# Altium PCB pdb-25.PcbDoc (part 2 of 4)
Units mil, origin at the board's own origin, x right, y up, seen from the top; angles counter-clockwise.
Board outline 5000 x 5500 mil, 4 copper layers (Top Layer, GND, 3V3, Bottom Layer), stack 23.756 mil thick; 410 components, 167 nets, 1014 pads, 884 vias.
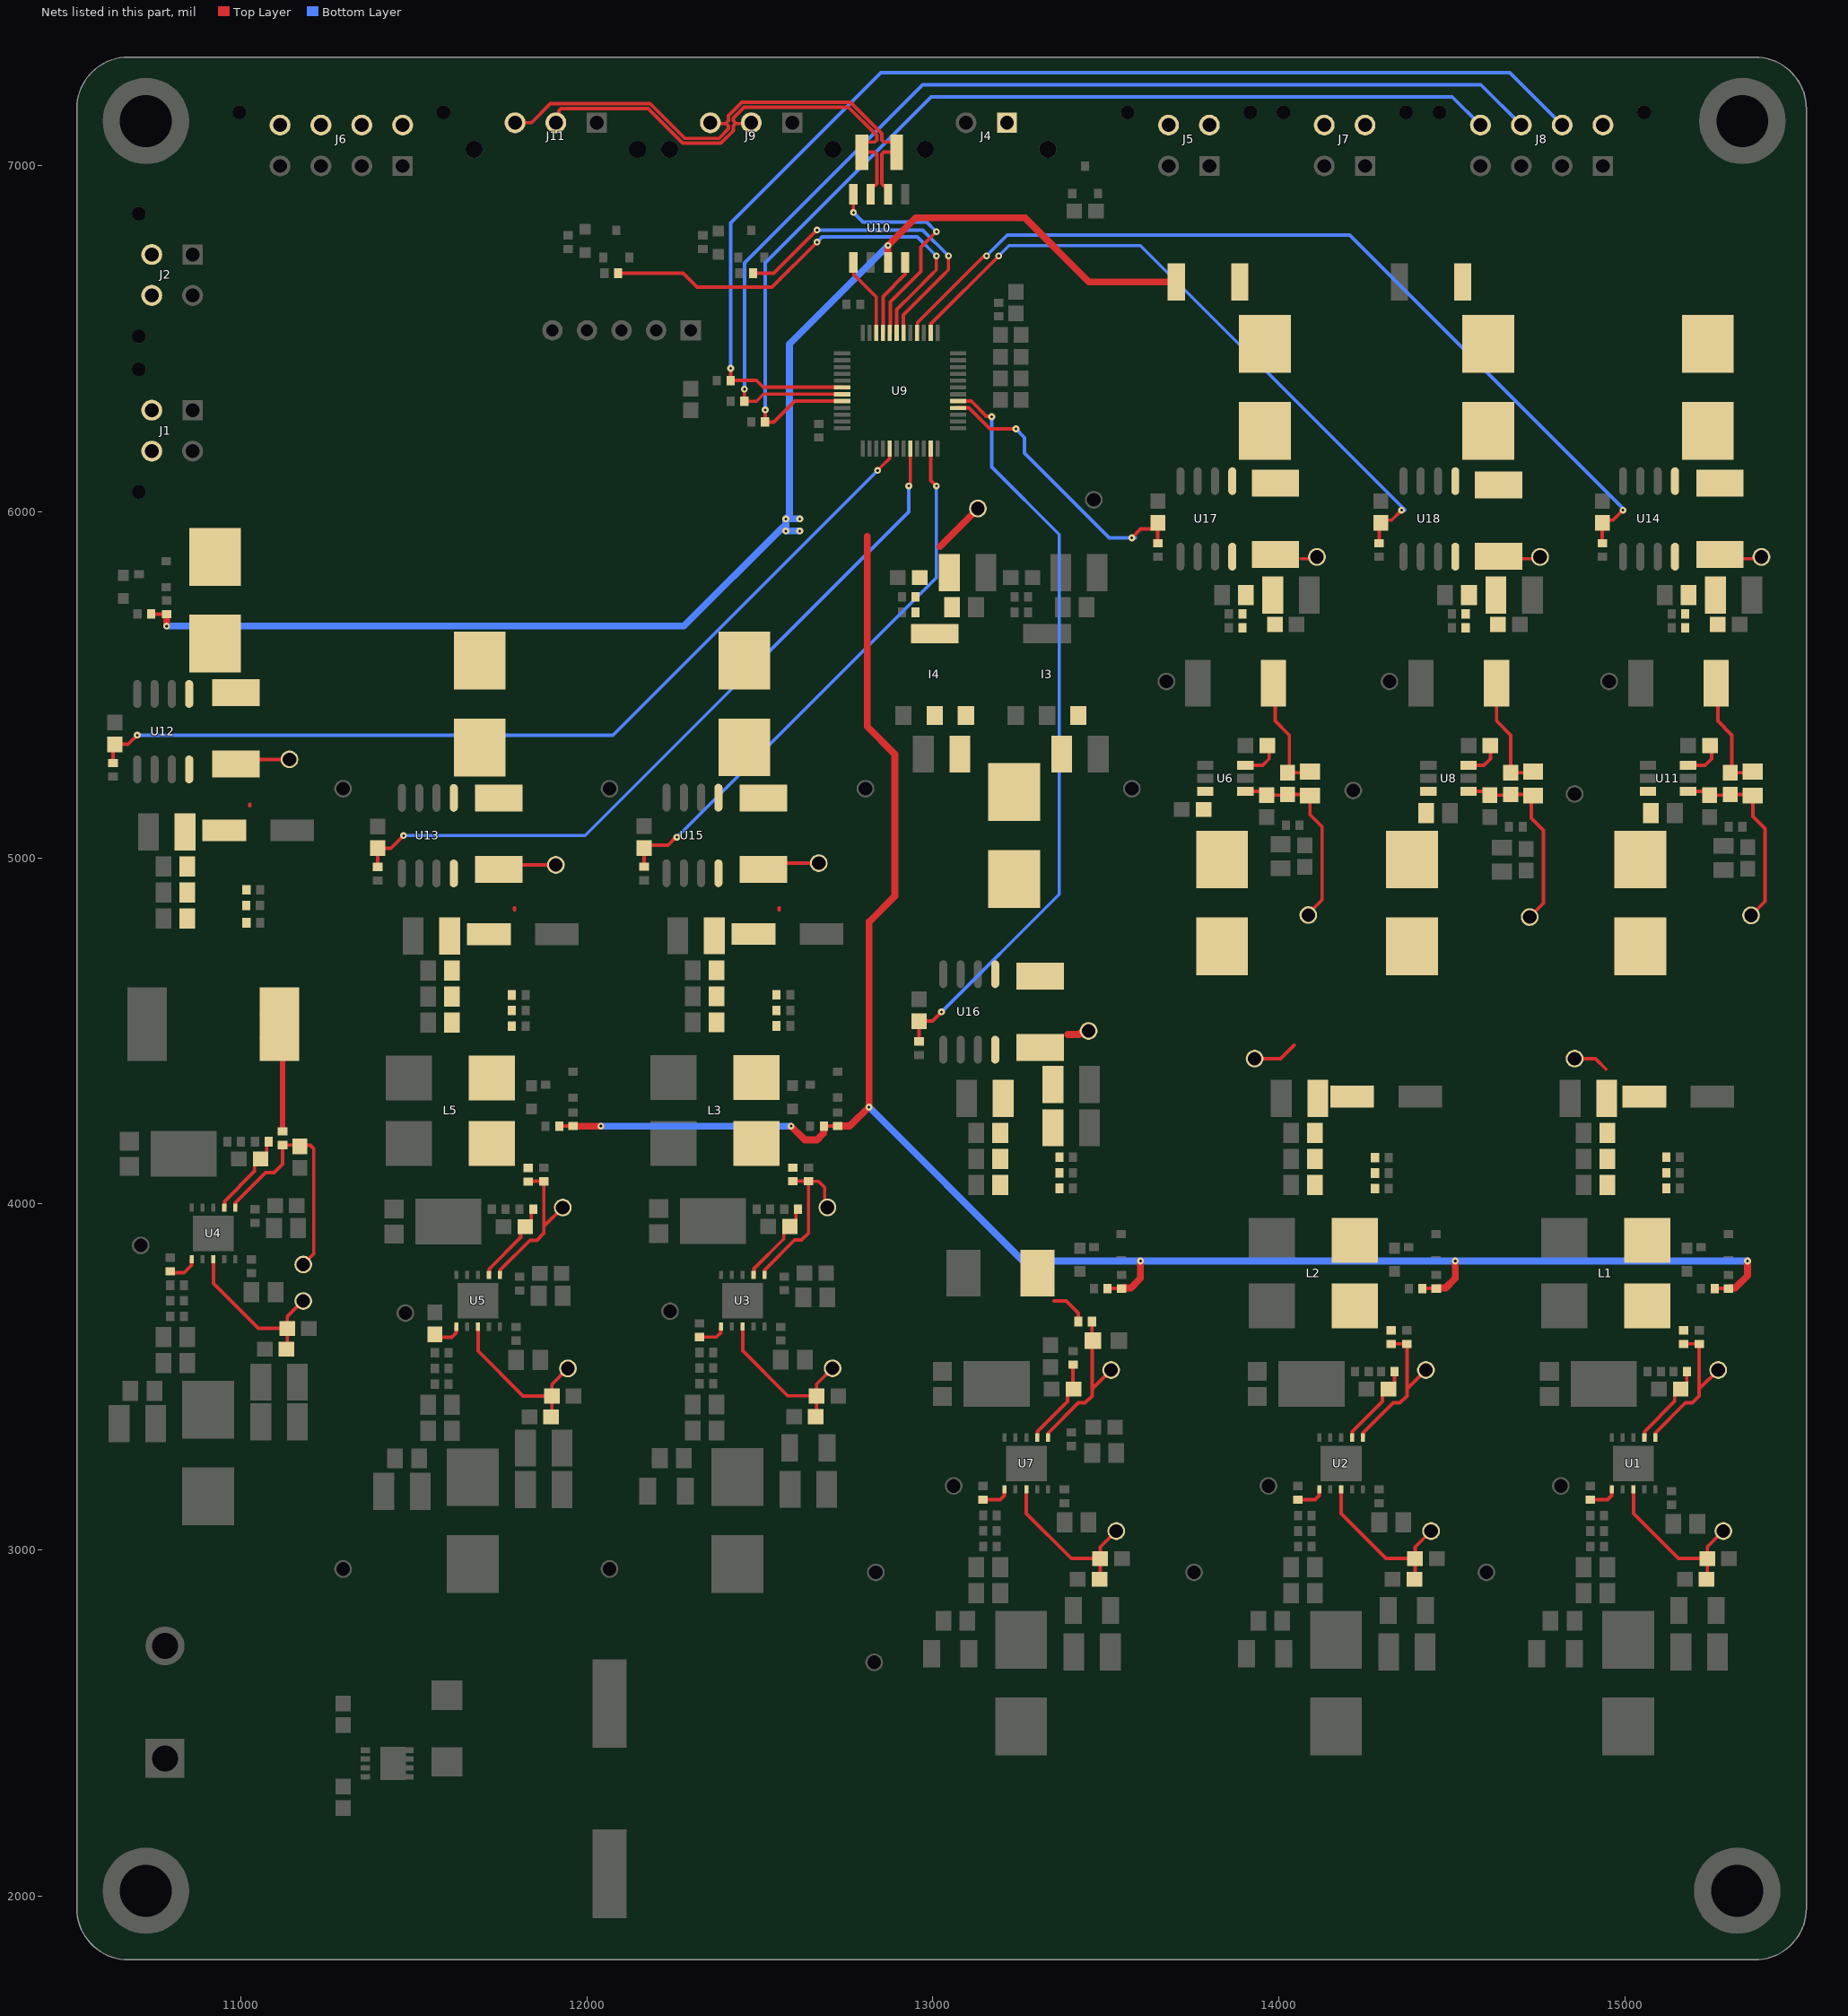
[diagram p4: the nets of this part, all layers, seen from the top]

## Part data
3V3 3V3 3V3 5V 5V 7V 12V 12V 12V 18V 24V EN EN EN EN EN EN FB FB FB FB FB FB FB FB FB GND GND GND GND GND GND GND GND GND GND GND SW SW SW SW SW SW SW SW SW VBAT: library part TEST-POINT-0001, "Oranange PC Test Point, Miniature Phoisphor Bronze Silver Plating Through Hole Mounting Type"
C1 C4 C22 C25 C43 C46 C64 C67 C79 C80 C85 C88 C100 C101 C114 C117: library part CAP-10U-0002, "CAP CER 10UF 50V X7R 1210", Capacitance="10 uF", Voltage=50V, ComponentLink1Description=Datasheet, ComponentLink1URL=https://mm.digikey.com/Volume0/opasdata/d220001/medias/docus/41/CL32B106KBJNNNE_Spec.pdf, Device Class=Ceramic, Size=1210
C2 C5 C23 C26 C44 C47 C65 C68 C86 C89 C115 C118: library part CAP-1U-0001, "CAP CER 1UF 50V X7R 0805", Capacitance="1.0 uF", Voltage="50 V", ComponentLink2Description=Datasheet, ComponentLink2URL=https://www.yageo.com/upload/media/product/productsearch/datasheet/mlcc/UPY-GPHC_X7R_6.3V-to-250V_24.pdf, Device Class=Ceramic, Size=0805
C3 C6 C24 C27 C45 C48 C66 C69 C87 C90 C116 C147 C148 C149 C150 C151 C152 C153 C161: library part CAP-0.1U-0002, "CAP CER 0.1UF 50V X7R 0805", Capacitance="100 nF", Voltage Rating="50 V", ComponentLink2Description=Datasheet, ComponentLink2URL=https://www.yageo.com/upload/media/product/productsearch/datasheet/mlcc/UPY-GPHC_X7R_6.3V-to-250V_24.pdf, Device Class=Ceramic, Size=0805
C7 C11 C28 C32 C49 C53 C70 C74 C91 C95 C162 C166: library part CAP-10N-0001, "CAP CER 10000PF 50V C0G/NP0 0805", Capacitance=10nF, Voltage=50V, ComponentLink1Description=Datasheet, ComponentLink1URL=https://search.murata.co.jp/Ceramy/image/img/A01X/G101/ENG/GRM2195C1H103JA01-01.pdf, Device Class=Ceramic, Size=0805
C8 C12 C29 C33 C50 C54 C71 C75 C92 C96 C163 C167: library part CAP-1N-0001, "CAP CER 1000PF 50V X7R 0402", Capacitance="1.0 nF", Voltage="50 V", ComponentLink2Description=Datasheet, ComponentLink2URL=http://www.yageo.com/documents/recent/UPY-GP_NP0_16V-to-50V_16.pdf, Device Class=Ceramic, Size=0402
C9 C13 C30 C34 C51 C55 C72 C76 C93 C97 C164 C177: library part CAP-100P-0001, "CAP CER 100PF 50V C0G/NPO 0402", Capacitance="100 pF", Voltage=50V, ComponentLink1Description=Datasheet, ComponentLink1URL=https://www.yageo.com/upload/media/product/productsearch/datasheet/mlcc/UPY-GP_NP0_16V-to-50V_18.pdf, Device Class=Ceramic, Size=0402
C10 C14 C31 C35 C52 C56 C73 C77 C94 C98 C165 C179: library part CAP-10P-0001, "CAP CER 10PF 50V C0G/NPO 0402", Capacitance="10 pF", Voltage=50V, ComponentLink1Description=Datasheet, ComponentLink1URL=https://www.yageo.com/upload/media/product/productsearch/datasheet/mlcc/UPY-GP_NP0_16V-to-50V_18.pdf, Device Class=Ceramic, Size=0402
C15 C36 C57 C78 C108 C109 C121 C122 C128 C129 C136 C137 C139 C140 C141 C171 C172 C180: library part CAP-0.1U-0001, "CAP CER 0.1UF 16V X7R 0402", Capacitance="100 nF", Voltage Rating="16 V", ComponentLink2Description=Datasheet, ComponentLink2URL=https://www.yageo.com/upload/media/product/productsearch/datasheet/mlcc/UPY-GPHC_X7R_6.3V-to-250V_24.pdf, Device Class=Ceramic, Size=0402
C16 C17 C37 C38 C58 C59 C181 C182: library part CAP-2.2U-0001, "CAP CER 2.2UF 100V X7R 1206", Capacitance=2.2uF, Voltage=100V, ComponentLink1Description=Datasheet, ComponentLink1URL=https://www.yageo.com/upload/media/product/productsearch/datasheet/mlcc/UPY-GPHC_X7R_6.3V-to-250V_24.pdf, Device Class=Ceramic, Size=1206
C18 C39 C60 C81 C102: library part CAP-47U-0003, "47 µF 35 V Aluminum - Polymer Capacitors Radial, Can - SMD 60mOhm 4000 Hrs @ 125°C", Capacitance="47 uF", Voltage=35V, Device Class=Electrolytic
C19 C40 C61 C82 C103 C184: library part CAP-2.7N-0001, "CAP CER 2700PF 50V C0G/NP0 0805", Capacitance=2.7nF, Voltage=50V, ComponentLink1Description=Datasheet, ComponentLink1URL=https://search.murata.co.jp/Ceramy/image/img/A01X/G101/ENG/GRM2165C1H272JA01-01.pdf, Device Class=Ceramic, Size=0805
C20 C41 C62 C83 C104 C185: library part CAP-6.8P-0001, "CAP CER 6.8PF 100V C0G/NPO 0603", Capacitance=6.8pF, Voltage=100V, ComponentLink1Description=Datasheet, ComponentLink1URL=https://www.yageo.com/upload/media/product/productsearch/datasheet/mlcc/UPY-GPHC_X7R_6.3V-to-250V_24.pdf, Device Class=Ceramic, Size=0603
C21 C42 C63 C105: library part CAP-510P-0001, "CAP CER 510PF 50V C0G/NP0 0402", Capacitance="510 pF", Voltage="50 V", ComponentLink2Description=Datasheet, ComponentLink2URL=https://www.mouser.com/ProductDetail/Walsin/0402N511J500CT?qs=u16ybLDytRbq33ukPPRl4A%3D%3D&srsltid=AfmBOoq1-HCbTRqPV3GtwyI6lHLBf095DSA3Qg1Qkiix4a-obr82TmJ6, Device Class=Ceramic, Size=0402
C84: library part CAP-3.9n-0001, "3900 pF ±5% 50V Ceramic Capacitor X7R 0402 (1005 Metric)", Capacitance=3.9n, Voltage=50V
C99 C106 C119 C154 C155 C156 C157 C158 C159 C160 C169 C178: library part CAP-100N-0001, "CAP CER 0.1UF 100V X7R 0603", Capacitance="100 nF", Voltage="100 V", ComponentLink1Description=Datasheet, ComponentLink1URL=https://www.yageo.com/upload/media/product/app/datasheet/mlcc/upy-np0x7r_mv_100-to-630v.pdf, Device Class=Ceramic, Size=0603
C107 C120 C127 C135 C170: library part CAP-10U-0001, "CAP CER 10UF 10V X5R 0603", Capacitance="10 uF", Voltage=10V, ComponentLink1Description=Datasheet, ComponentLink1URL=https://www.yageo.com/upload/media/product/app/datasheet/mlcc/upy-gphc_x5r_4v-to-50v.pdf, Device Class=Ceramic, Size=0603
C110 C123 C130 C138 C173: library part CAP-470P-0001, "CAP CER 470PF 50V C0G/NPO 0805", Capacitance="470 pF", Voltage=50V, ComponentLink1Description=Datasheet, ComponentLink1URL=https://www.yageo.com/upload/media/product/productsearch/datasheet/mlcc/UPY-GP_NP0_16V-to-50V_18.pdf, Device Class=Ceramic, Size=0805
C111 C142: library part CAP-4.7U-0001, "CAP CER 4.7UF 25V X5R 0603", Capacitance="4.7 uF", Voltage=25V, Device Class=Ceramic, Size=0603
C112 C125 C175: library part CAP-82P-0001, "82 pF ±5% 50V Ceramic Capacitor C0G, NP0 0805 (2012 Metric)", Capacitance=82pF, Voltage=50V
C113 C126 C176 C183 C186: library part CAP-47U-0002, "CAP CER 47UF 16V X5R 1210", Capacitance="47 uF", Voltage=16V, ComponentLink1Description=Datasheet, ComponentLink1URL=https://search.murata.co.jp/Ceramy/image/img/A01X/G101/ENG/GRM32ER61C476KE15-01.pdf, Device Class=Ceramic, Size=1210
C124 C174: library part CAP-4.7U-0002, "CAP CER 4.7UF 50V X5R 0805", Capacitance="4.7 uF", Voltage="50 V", ComponentLink2Description=Datasheet, ComponentLink2URL=http://www.yageo.com/documents/recent/UPY-GPHC_Y5V_6.3V-to-50V_8.pdf, Device Class=Ceramic, Size=0805
C131 C132 C133 C134: library part CAP-10U-0003, "CAP TANT 10UF 10% 16V 1206", Capacitance="10 uF", Voltage=16V, ComponentLink1Description=Datasheet, ComponentLink1URL=https://www.lcsc.com/datasheet/lcsc_datasheet_2304140030_Vishay-Intertech-293D106X9016A2TE3_C110038.pdf, Device Class=Tantalum, Size=1206
C143 C145: library part CAP-10N-0002, "CAP CER 10000PF 50V X7R 0603", Capacitance="10 nF", Voltage="50 V", ComponentLink2Description=Datasheet, ComponentLink2URL=http://www.yageo.com/documents/recent/UPY-GPHC_X7R_6.3V-to-50V_18.pdf, Device Class=Ceramic, Size=0603
C144 C146: library part CAP-1U-0002, "CAP CER 1UF 16V X7R 0603", Capacitance="1.0 uF", Voltage=16V, Device Class=Ceramic, Size=0603
C168: library part CAP-100U-0001, "CAP ALUM 100UF 20% 100V SMD", Capacitance="100 uF", Voltage=100V, ComponentLink1Description=Datasheet, ComponentLink1URL=https://industrial.panasonic.com/cdbs/www-data/pdf/RDE0000/ABA0000C1190.pdf, Device Class=Electrolytic
C187: library part CAP-3N-0001, "3000 pF ±5% 50V Ceramic Capacitor C0G, NP0 0603 (1608 Metric)", Capacitance="3 nF", Voltage=50V, ComponentLink1Description=Datasheet, ComponentLink1URL=https://mm.digikey.com/Volume0/opasdata/d220001/medias/docus/41/CL32B106KBJNNNE_Spec.pdf, Device Class=Ceramic, Size=1210
D1 D3 D5 D7 D9 D11 D13 D14: library part LED-0001, "LED YELLOW CLEAR 0603 SMD", Forward Current=30mA, Forward Voltage=2V, ComponentLink1Description=Datasheet, ComponentLink1URL=https://www.americanbrightled.com/pdffiles/led-components/smt/BL-HKC36G-AV-TRB.pdf
D2 D4 D6 D8 D10 D12: library part DIO-SCHOTTKY-0001, "DIODE SCHOTTKY 60V 7A POWERDI5", Forward Current=7A, Reverse Voltage (DC)=60V, ComponentLink1Description=Datasheet, ComponentLink1URL=https://www.diodes.com/assets/Datasheets/PDS760.pdf
D15: library part DIO-TVS-0001, "TVS DIODE 40VWM 64.5VC DO214AA", Current Rating=9.3A, Voltage Rating=64.5V, ComponentLink1Description=Datasheet, ComponentLink1URL=https://www.littelfuse.com/media?resourcetype=datasheets&itemid=09a6ae9a-73cb-4ac4-acac-e6dab92ab953&filename=littelfuse_tvs_diode_smbj_datasheet.pdf
F1 F2 F3 F4 F5 F6 F7 F8 F9 F10 F11 F12 F13 F14 F15 F16: library part FUSE-0001, "FUSE BLOK CARTRIDGE 125V 10A SMD", Fuse Current=8A, Voltage Rating=125V, ComponentLink2Description=Datasheet, ComponentLink2URL=https://www.littelfuse.com/~/media/electronics/datasheets/fuses/littelfuse_fuse_154_154t_154l_154tl_datasheet.pdf.pdf
I1 I2 I5: library part IND-5.6U-0002, "FIXED IND 5.6UH 5.5A 38 MOHM SMD", Inductance=5.6uH, Saturation Current=5.5A
I3: library part IC_LDO_3V3_0001, "IC REG LIN 3.3V 800MA SOT223-4", ComponentLink1Description="New link", ComponentLink1URL=https://www.ti.com/lit/ds/symlink/lm1117.pdf?HQS=dis-dk-null-digikeymode-dsf-pf-null-wwe&ts=1721700739746
I4: library part IC_LDO_5V_0001, "IC REG LINEAR 5V 800MA SOT223-4", ComponentLink1Description=Datasheet, ComponentLink1URL=https://www.ti.com/lit/ds/symlink/lm1117.pdf?HQS=dis-dk-null-digikeymode-dsf-pf-null-wwe&ts=1721700739746
J1 J2 J5 J7: library part CONN-4POS-0002, "CONN HEADER VERT 4POS 3MM", ComponentLink1Description=Datasheet, ComponentLink1URL=https://www.molex.com/content/dam/molex/molex-dot-com/products/automated/en-us/salesdrawingpdf/430/43045/430450412_sd.pdf?inline
J3: library part CONN-2POS-0003
J4: library part CONN-2POS-0002, "CONN HEADER VERT 2POS 3MM", ComponentLink1Description=Datasheet, ComponentLink1URL=https://www.molex.com/content/dam/molex/molex-dot-com/products/automated/en-us/salesdrawingpdf/436/43650/436500215_sd.pdf?inline
J6 J8: library part CONN-8POS-0001, Package=43045-0812, DeviceName=43045-0812, DeviceSetName=HEADER_POS8_?, GateName_1=G$1, LibraryName=con-molex-micro-fit-3_0_2, SymbolName_1=HEADER_POS8
J9 J11: library part "Micro-Fit Molex 3 Pin Vertical", Package=43650-0315, DeviceName=43650-0315, DeviceSetName=HEADER_POS3_?, GateName_1=G$1, LibraryName=con-molex-micro-fit-3_0_2, SymbolName_1=HEADER_POS3
J10: "Header, 5-Pin", LatestRevisionDate=17-Jul-2002, LatestRevisionNote="Re-released for DXP Platform.", Publisher="Altium Limited"
L1 L2 L3 L5: library part IND-15U-0002-NoJLC, "SMD MOLDING POWER CHOKE", Current Rating=6A, Inductance=15uH, ComponentLink1Description=Datasheet, ComponentLink1URL=https://www.digikey.com/en/products/detail/codaca/CSAD1010-150M/16633512?s=N4IgjCBcoBwAxVAYygMwIYBsDOBTANCAPZQDaIALHAExwDMEAuoQA4AuUIAymwE4CWAOwDmIAL6Ew1MAE5EIFJAw4CxMiGoy6AdmoUQhajGqa6BjTDp6zhywFY4c23UtOLFbVXPVtYK3e9dODsbdwA2OxgQZhB2Th4BEXFJTQhoBTQsPEISSHITS0do1g5Ibj4hUQkNOBhteTiygFVBfjYAeVQAWVx0bABXXlxzfs4AVoAJcwBbIU4wAMJp9AAPeYDq2hgo9MaQFrbOnr7B4cJRsoBBGbmyuwA6DcIAWmp5RT5%2B1VzyAMYxAFAA
L4: library part IND-39u-0001, "FIXED IND 39UH 4.2A 66 MOHM SMD", Current=4.2A, Inductance=39u
L6: library part IND-8.2U-0001, "8.2 µH Shielded Molded Inductor 4 A 68mOhm Max Nonstandard", Current Rating=7.5A, Inductance=8.2uH, ComponentLink1Description=Datasheet, ComponentLink1URL=https://products.sumida.com/products/pdf/CDRH104.pdf
Q1 Q2 Q3 Q4 Q5 Q6 Q7 Q8: library part NMOS-200MA-0001, "MOSFET N-CH 60V 200MA SOT23", Continuous Current=200mA, Voltage=60V, ComponentLink1Description=Datasheet, ComponentLink1URL=https://toshiba.semicon-storage.com/info/T2N7002AK_datasheet_en_20150401.pdf?did=29712&prodName=T2N7002AK
Q9: library part NMOS-60A-0001, "MOSFET N-CH 60V 12A/60A 8VSON", Continuous Current=60A, Voltage=60V, ComponentLink2Description=Datasheet, ComponentLink2URL=http://www.ti.com/lit/ds/symlink/csd18543q3a.pdf
Q10: library part NMOS-200MA-0001, "MOSFET N-CH 60V 200MA SOT23", Manufacturer=Toshiba, Package=SOT-23-3, Assembled?=no, FET type=N-Channel, Id-Continuous=200mA, Manufacturer Part Number=T2N7002AK,LM, Rds On-Max=3.9Ohm, VDS-Max=60V, Vgs-Max=20V
R1 R9 R17 R25 R33 R43: library part RES-240-0001, "240R 0.063W 1% 0402 (1005 Metric)  SMD", Power=1/16W, Resistance=240R, Tolerance=1%, ComponentLink1Description=Datasheet, ComponentLink1URL=https://www.yageo.com/upload/media/product/products/datasheet/rchip/PYu-RC_Group_51_RoHS_L_12.pdf, Size=0402
R2 R10 R18 R26 R34 R44: library part RES-2.15M-0001, "RES SMD 2.15M OHM 1% 1/10W 0603", Power=1/10W, Resistance=2.15M, Tolerance=1%, ComponentLink1Description=Datasheet, ComponentLink1URL=https://www.yageo.com/upload/media/product/products/datasheet/rchip/PYu-RC_Group_51_RoHS_L_12.pdf, Size=0603
R3 R11 R19 R27 R35 R45: library part RES-1k-0001, "RES 1K OHM 1% 1/16W 0402", Power=1/16W, Resistance=1k, Tolerance=1%, ComponentLink1Description=Datasheet, ComponentLink1URL=https://www.yageo.com/upload/media/product/products/datasheet/rchip/PYu-RC_Group_51_RoHS_L_12.pdf, Size=0402
R4 R12 R20 R28 R36 R41 R46 R48 R88 R89: library part RES-100k-0001, "RES SMD 100K OHM 1% 1/10W 0603", Power=100mW, Resistance=100k, Tolerance=1%, ComponentLink1Description=Datasheet, ComponentLink1URL=https://www.yageo.com/upload/media/product/products/datasheet/rchip/PYu-RC_Group_51_RoHS_L_12.pdf, Size=0603
R5 R13 R21: library part RES-147k-0001, "RES 147K OHM 1% 1/16W 0402", Power=1/16W, Resistance=147k, Tolerance=1%, ComponentLink1Description=Datasheet, ComponentLink1URL=https://www.yageo.com/upload/media/product/products/datasheet/rchip/PYu-RC_Group_51_RoHS_L_12.pdf, Size=0402
R6 R14 R22: library part RES-59k-0001, "RES 59K OHM 1% 1/16W 0402", Power=1/16W, Resistance=59k, Tolerance=1%, ComponentLink1Description=Datasheet, ComponentLink1URL=https://www.digikey.com/en/products/detail/yageo/RC0402FR-0759KL/2827634?s=N4IgTCBcDaIEoGEAMAWJYBicC0SDsArAJwDSAMiALoC%2BQA, Size=0402
R7 R15 R23 R31 R39 R93: library part RES-178k-0001_1, "62.5mW Thick Film Resistors 50V ±100ppm/℃ ±1% 178kΩ 0402 Chip Resistor - Surface Mount ROHS", Power=1/16W, Resistance=178k, Tolerance=1%, ComponentLink1Description=Datasheet, ComponentLink1URL=https://www.lcsc.com/datasheet/lcsc_datasheet_2304140030_RALEC-RTT021783FTH_C102842.pdf, Size=0402
R8 R16 R24: library part RES-10.5k-0001, "RES 10.5K OHM 1% 1/16W 0402", Power=1/16W, Resistance=10.5k, Tolerance=1%, ComponentLink1Description=Datasheet, ComponentLink1URL=https://www.yageo.com/upload/media/product/products/datasheet/rchip/PYu-RC_Group_51_RoHS_L_12.pdf, Size=0402
R29: library part RES-348k-0001, "348 kOhms ±1% 0.063W, 1/16W Chip Resistor 0402 (1005 Metric) Moisture Resistant Thick Film", Power="1/16 W", Resistance=348K
R30: library part RES-43.2k-0001, "43.2 kOhms ±1% 0.063W, 1/16W Chip Resistor 0402 (1005 Metric) Moisture Resistant Thick Film", Resistance=43.2k, Parameter 1=1/16W
R32: library part RES-12k-0001, "RES 12K OHM 1% 1/10W 0603", Power=1/10W, Resistance=12k, Tolerance=1%, ComponentLink1Description=Datasheet, ComponentLink1URL=https://www.lcsc.com/datasheet/lcsc_datasheet_2304140030_YAGEO-RC0603FR-0712KL_C114659.pdf, Size=0603
R37: library part RES-243k-0001, "243 kOhms ±1% 0.063W, 1/16W Chip Resistor 0402 (1005 Metric) Moisture Resistant Thick Film", Power=1/16W, Resistance=243k, Tolerance=1%, ComponentLink1Description=Datasheet, ComponentLink1URL=https://www.yageo.com/upload/media/product/products/datasheet/rchip/PYu-RC_Group_51_RoHS_L_12.pdf, Size=0402
R38: library part RES-82.5k-0001, "82.5 kOhms ±1% 0.063W, 1/16W Chip Resistor 0402 (1005 Metric) Moisture Resistant Thick Film", Power=1/16W, Resistance=82.5k, Tolerance=1%, ComponentLink1Description=Datasheet, ComponentLink1URL=https://www.lcsc.com/datasheet/lcsc_datasheet_2304140030_YAGEO-RC0603FR-0712KL_C114659.pdf, Size=0603
R40: library part RES-11.3k-0001, "11.3 kOhms ±1% 0.063W, 1/16W Chip Resistor 0402 (1005 Metric) Moisture Resistant Thick Film", Power=1/16W, Resistance=11.3k, Tolerance=1%, ComponentLink1Description=Datasheet, ComponentLink1URL=https://www.yageo.com/upload/media/product/products/datasheet/rchip/PYu-RC_Group_51_RoHS_L_12.pdf, Size=0603
R42: library part RES-13.7K-0001, "RES 13.7K OHM 1% 1/10W 0603", Power=1/10W, Resistance=13.7k
R47: library part RES-80.6k-0001, "80.6 kOhms ±1% 0.063W, 1/16W Chip Resistor 0402 (1005 Metric) Moisture Resistant Thick Film", Power=1/16W, Resistance=80.6k, Tolerance=1%, ComponentLink1Description=Datasheet, ComponentLink1URL=https://www.yageo.com/upload/media/product/products/datasheet/rchip/PYu-RC_Group_51_RoHS_L_12.pdf, Size=0402
R49 R90: library part RES-22k-0001, "22 kOhms ±1% 0.1W, 1/10W Chip Resistor 0603 (1608 Metric) Moisture Resistant Thick Film", Power=1/10W, Resistance=22K
R50 R51 R52 R76 R77 R78 R82 R83 R84 R86: library part RES-10k-0001, "RES 10K OHM 1% 1/16W 0402", Power=1/16W, Resistance=10k, Tolerance=1%, ComponentLink1Description=Datasheet, ComponentLink1URL=https://www.yageo.com/upload/media/product/products/datasheet/rchip/PYu-RC_Group_51_RoHS_L_12.pdf, Size=0402
R53 R54: library part RES-470-0001, "RES 470 OHM 1% 1/16W 0402", Power=1/16W, Resistance=470R, Tolerance=1%, ComponentLink1Description=Datasheet, ComponentLink1URL=https://www.yageo.com/upload/media/product/products/datasheet/rchip/PYu-RC_Group_51_RoHS_L_12.pdf, Size=0402
R55: library part RES-120-0001, "RES 120 OHM 1% 1/2W 1210", Power=1/2W, Resistance=120R, Tolerance=1%, ComponentLink1Description=Datasheet, ComponentLink1URL=https://www.yageo.com/upload/media/product/products/datasheet/rchip/PYu-RC_Group_51_RoHS_L_12.pdf, Size=1210
R57 R58: library part RES-100-0001, "RES 100 OHM 1% 1/16W 0402", Power=1/16W, Resistance=100R, Tolerance=1%, ComponentLink1Description=Datasheet, ComponentLink1URL=https://www.yageo.com/upload/media/product/products/datasheet/rchip/PYu-RC_Group_51_RoHS_L_12.pdf, Size=0402
R59 R60 R61 R65 R66 R67 R71: library part RES-47-0001, "RES 47 OHM 1% 1/10W 0603", Power=1/10W, Resistance=47R, Tolerance=1%, ComponentLink1Description=Datasheet, ComponentLink1URL=https://www.yageo.com/upload/media/product/products/datasheet/rchip/PYu-RC_Group_51_RoHS_L_12.pdf, Size=0603
R62 R63 R64 R68 R69 R70 R72: library part RES-47k-0001, "PTC Thermistor 47 kOhms 0402 (1006 Metric)", Resistance="47k +- 1%"
R73 R74 R75 R79 R80 R81 R85: library part RES-0.5m-0001, "2512 Chip Resistor - Surface Mount ROHS", Power=3W, Resistance=0.5m, Tolerance=1%, ComponentLink1Description=Datasheet, ComponentLink1URL=https://www.yageo.com/upload/media/product/products/datasheet/rchip/PYu-RC_Group_51_RoHS_L_12.pdf, Size=0402
R87: library part RES-200k-0001, "RES SMD 200K OHM 1% 1/10W 0603", Power=100mW, Resistance=200k, Tolerance=1%, ComponentLink1Description=Datasheet, ComponentLink1URL=https://www.yageo.com/upload/media/product/products/datasheet/rchip/PYu-RC_Group_51_RoHS_L_12.pdf, Size=0603
R91: library part RES-0-0001, "0 Ohms Jumper 0.1W, 1/10W Chip Resistor 0603 (1608 Metric) Automotive AEC-Q200 Thick Film", Package Size=0603, Power="1/10 W", Resistance=10kOhm
R92: library part RES-36.5k-0001, "36.5 kOhms ±1% 0.063W, 1/16W Chip Resistor 0402 (1005 Metric) Moisture Resistant Thick Film", Power=1/16W, Resistance=36.5k
R94: library part RES-10.4k-0001, "10.4 kOhms ±0.1% 0.125W, 1/8W Chip Resistor 0805 (2012 Metric) Thin Film", Power=1/8W, Resistance=10.4k, Tolerance=1%, ComponentLink1Description=Datasheet, ComponentLink1URL=https://www.yageo.com/upload/media/product/products/datasheet/rchip/PYu-RC_Group_51_RoHS_L_12.pdf, Size=0402
U1 U2 U3 U4 U5 U7: library part IC-BUCK-0001, "IC REG BUCK ADJ 5A 10WSON", ComponentLink1Description=Datasheet, ComponentLink1URL=https://www.ti.com/general/docs/suppproductinfo.tsp?distId=10&gotoUrl=https%3A%2F%2Fwww.ti.com%2Flit%2Fgpn%2Ftps54561
U6 U8 U11: library part IC-BUCK-0004, "IC REG BUCK ADJ 3A SOT23"
U9: library part IC-STM32G431CBT6, "IC MCU 32BIT 128KB FLASH 48LQFP", Package=48LQFP, ComponentLink1Description=Datasheet, ComponentLink1URL=https://www.st.com/resource/en/datasheet/stm32g431cb.pdf
U10: library part IC-CAN-0001, "IC TRANSCEIVER 1/1 8SOIC", ComponentLink1Description=Datasheet, ComponentLink1URL=https://www.ti.com/lit/ds/symlink/tcan1044-q1.pdf?HQS=dis-dk-null-digikeymode-dsf-pf-null-wwe&ts=1728758303289&ref_url=https%253A%252F%252Fwww.ti.com%252Fgeneral%252Fdocs%252Fsuppproductinfo.tsp%253FdistId%253D10%2526gotoUrl%253Dhttps%253A%252F%252Fwww.ti.com%252Flit%252Fgpn%252Ftcan1044-q1
U12 U13 U14 U15 U16 U17 U18: library part IC-CURR-0001, "Current Sense Amplifier 1 Circuit 8-MSOP"

## Free pads (board coordinates)
  round 250 hole 150: ""(10725,2015) ""(10725,7130) ""(15325,2015) ""(15340,7130)

## Via types
v1: diameter 20, hole 8, Top Layer to Bottom Layer, 854 vias
v2: diameter 17.72, hole 7.87, Top Layer to Bottom Layer, 30 vias

## Nets (pads, with @x,y where several pads share a name; then routed paths per layer and width w, separated by ;. In a path a pad name is that pad's centre, name@x,y a point inside that pad or via, vN(x,y) a via of type N, cw(c..) or ccw(c..) an arc to the next point about the centre after c; other vN are vias at no path point)
3V3: 
3V3_AUTONLED: 3V3.1@15395,5870 C170.2 C171.2 C172.2 C173.2 C175.2 C176.2 I5.2 R75.2 R89.2 U14.8 | length 468.8
  Top Layer w10: I5.2@15268.9,5505 15268.9,5395.75 15309.65,5355 15309.65,5246.5 15371.5,5246.5 C175.2@15374.65,5249.65 ; R75.2@15275,5877 15287.09,5864.91 15389.91,5864.91 3V3.1@15395,5870
3V3_AUTONLED_C: F14.1 R75.1 U14.1
3V3_AUTONLED_F: F14.2 J8.5
3V3_BUCK: 3V3.1@14755,5870 C120.2 C121.2 C122.2 C123.2 C125.2 C126.2 I2.2 R48.2 R85.2 U18.8 | length 393.8
  Top Layer w10: I2.2@14629.25,5505 14629.25,5395.75 14670,5355 R48.2@14670,5246.5 14731.85,5246.5 C125.2@14735,5249.65 ; 14705,5865 14750,5865 3V3.1@14755,5870
3V3_BUCK_C: F15.1 R85.1 U18.1
3V3_BUCK_F: ?.1 F15.2 J7.3 J7.4
5V_BUCK: 5V.1@14110,5870 C107.2 C108.2 C109.2 C110.2 C112.1 C113.1 I1.2 R41.1 R81.2 U17.8 | length 388.8
  Top Layer w10: I1.2@13989.61,5505 13989.61,5395.75 14030.35,5355 14030.35,5246.5 14092.2,5246.5 C112.1@14095.35,5249.65 ; 14065,5865 14105,5865 5V.1@14110,5870
5V_BUCK_C: F16.1 R81.1 U17.1
5V_BUCK_F: ?.2@13886.54,6665 F16.2 J4.1@13214.06,7125 J5.3 J5.4
5V_LDO: 5V.1@13130,6010 ?.5V_LDO C127.2 C128.2 C129.2 C130.2 C134.2 I4.2 I4.4 R1.2 R3.2 R9.2 R11.2 R17.2 R19.2 R25.2 R27.2 R33.2 R35.2 R43.2 R45.2 U10.3 | length 10018.2
  Top Layer w10: R25.2@10740,5705 R27.2@10785,5705 ; R33.2@11919.68,4225.5 11919.84,4225.66 R35.2@11959.84,4225.66 ; R35.2@11960,4225.31 R35.2@11960.41,4224.91 ; v1@12039.91,4224.91 v1(12040,4225) ; R17.2@12685.53,4225.16 R19.2@12725,4225.16 ; R43.2@13504.68,3755.5 13504.84,3755.66 R45.2@13544.84,3755.66 ; R9.2@14414.68,3755.5 14414.84,3755.66 R11.2@14454.84,3755.66 ; R1.2@15259.68,3755.5 15259.84,3755.66 R3.2@15299.84,3755.66
  Top Layer w20: v1(10785,5670) R27.2@10785,5705 ; R35.2@11960.41,4224.91 v1@12039.91,4224.91 ; v1(12590,4225) 12630,4185 12665,4185 12684.68,4204.69 R17.2@12684.68,4225 ; R19.2@12725,4225.31 12759.68,4225.31 12815,4280.63 12815,4815 12890,4890 12890,5300 12810,5380 12810,5930 ; U10.3@12870,6721.57 v1(12870,6770) 12950,6850 13265.92,6850 13450.92,6665 ?.5V_LDO@13703.46,6665 ; 13020,5900 5V.1@13130,6010 ; R45.2@13545,3755.32 13546.81,3757.13 13572.13,3757.13 13600,3785 v1(13600,3835) ; R11.2@14455,3755.32 14456.81,3757.13 14482.13,3757.13 14510,3785 v1(14510,3835) ; R3.2@15303.78,3755.32 15303.78,3757.13 15319.32,3757.13 15355,3792.81 v1(15355,3835)
  Bottom Layer w20: v1(10785,5670) 12280,5670 12565,5955 ; v1(12040,4225) v1(12590,4225) ; v1(12615,5945) v1(12575,5945) v1(12575,5980) ; v1(12615,5980) v1(12575,5980) ; v1(12815,4280) 13260,3835 v1(13600,3835) v1(14510,3835) v1(15355,3835) ; v1(12870,6770) 12585,6485 12585,5990 v1(12575,5980)
7V_BUCK: 7V.1 C117.2 C118.2 C161.2 C166.2 C167.2 C177.2 C179.2 C183.1 C186.1 L6.2 R47.1 R80.2 U16.8 | length 173.8
  Top Layer w10: 13350,3720 13385,3720 13420.32,3684.68 R47.1@13420.32,3660
  Top Layer w20: 13390,4490 13422.69,4490 13426.73,4494.03 13444.03,4494.03 7V.1@13450,4500
7V_BUCK_C: F10.1 R80.1 U16.1
7V_BUCK_F: C131.2 C133.2 F10.2 I3.3 I4.3
12V_AUTONLED: 12V.1@14855,4420 C4.2 C5.2 C6.2 C11.2 C12.2 C13.2 C14.2 C18.2 F11.1 L1.2 R5.2 | length 103.3
  Top Layer w10: 12V.1@14855,4420 14915,4420 14945.65,4389.35
12V_AUTONLED_FUSED: C174.2 F11.2 U11.3
12V_BUCKS: 12V.1@13930,4420 C25.2 C26.2 C27.2 C32.2 C33.2 C34.2 C35.2 C39.2 F12.1 F13.1 L2.2 R13.2 | length 164.6
  Top Layer w10: 12V.1@13925.59,4400.59 12V.1@13950,4425 ; 12V.1@13930,4420 13950,4420 14005,4420 14043.96,4458.96
12V_BUCKS_FUSED_0: C111.2 F13.2 U6.3
12V_BUCKS_FUSED_1: C124.2 F12.2 U8.3
12V_REST: 12V.1@12670,4985 C46.2 C47.2 C48.2 C53.2 C54.2 C55.2 C56.2 C60.2 L3.2 R21.2 R79.2 U15.8 | length 174
  Top Layer w10: R79.2@12510,4967 12528,4985 12V.1@12670,4985 ; R79.2@12549.84,4954.84 R79.2@12549.84,4956.34 ; 12555,4850.5 12555,4855.5
12V_REST_C: F8.1 R79.1 U15.1
12V_REST_F: F8.2 J6.5 J6.6 J6.7 J6.8
18V_BUCK: 18V.1 C88.2 C89.2 C90.2 C95.2 C96.2 C97.2 C98.2 C102.2 L5.2 R37.2 R74.2 U13.8 | length 176.4
  Top Layer w10: R74.2@11745,4967 11758,4980 18V.1@11910,4980 ; R74.2@11784.25,4954.25 R74.2@11784.25,4955.25 ; 11790,4850 11790,4855
18V_BUCK_C: F7.1 R74.1 U13.1
18V_BUCK_F: F7.2 J2.3 J2.4
24V_BUCK: 24V.1 C67.2 C68.2 C69.2 C74.2 C75.2 C76.2 C77.2 C81.2 L4.2 R29.2 R73.2 U12.8 | length 511.5
  Top Layer w10: R73.2@10985,5272 10998,5285 24V.1@11140,5285 ; 11025,5150.5 11025,5155.5 ; L4.2@11059.58,4480.81 11070.32,4470.06 L4.2@11070.32,4460.68 ; L4.2@11059.58,4547.81 L4.2@11062.77,4551
  Top Layer w15: L4.2@11096,4520 L4.2@11100,4516 ; R29.2@11120,4209.69 L4.2@11120,4521
24V_BUCK_C: F9.1 R73.1 U12.1
24V_BUCK_F: F9.2 J1.3 J1.4
AUTON_LED_B_MCU: J8.6 R52.1 U9.42 | length 3432.9
  Top Layer w10: v1(12415.32,6415) 12415.16,6414.84 12415.16,6380.16 12489.84,6380.16 12509.21,6360.79 12736.73,6360.79 U9.42@12737.68,6359.84
  Bottom Layer w10: v1(12415.32,6415) 12415.32,6835.31 12850,7270 14667.17,7270 J8.6@14819.06,7118.11
AUTON_LED_G_MCU: J8.7 R51.1 U9.43 | length 3199.2
  Top Layer w10: v1(12455.16,6354.84) 12455,6354.69 12455,6320 12490,6320 12510.79,6340.79 12737.05,6340.79 U9.43@12737.68,6340.16
  Bottom Layer w10: v1(12455.16,6354.84) 12455.16,6720.16 12970,7235 14584.05,7235 J8.7@14700.94,7118.11
AUTON_LED_R_MCU: J8.8 R50.1 U9.44 | length 3007.6
  Top Layer w10: R50.1@12514.84,6260.16 R50.1@12514.68,6260 12540,6260 12600.79,6320.79 12737.36,6320.79 U9.44@12737.68,6320.47 ; v1(12515,6295) 12514.84,6294.84 12514.84,6264.84 R50.1@12517.18,6262.5
  Bottom Layer w10: v1(12515,6295) 12515,6720 12995,7200 14500.94,7200 J8.8@14582.83,7118.11
BOOT_0: C15.1 U1.1 | length 85.2
  Top Layer w10: C15.1@14900,3145.32 14949.82,3145.32 14961.64,3157.14 14961.64,3175.33 U1.1@14962.01,3175.7
BOOT_1: C36.1 U2.1 | length 85.2
  Top Layer w10: C36.1@14055,3145.32 14104.82,3145.32 14116.64,3157.14 14116.64,3175.33 U2.1@14117.01,3175.7
BOOT_2: C57.1 U3.1 | length 92
  Top Layer w10: C57.1@12318.49,3615.32 12374.32,3615.32 12386.64,3627.64 12386.64,3645.83 U3.1@12387.01,3646.2
BOOT_3: C78.1 U4.1 | length 74.2
  Top Layer w10: 10810,3801.32 10835.32,3801.32 10856.64,3822.64 10856.64,3840.83 U4.1@10857.01,3841.2
BOOT_4: C99.1 U5.1 | length 88.7
  Top Layer w10: C99.1@11560,3623 11568,3615 11609.5,3615 11621.64,3627.14 11621.64,3645.33 U5.1@11622.01,3645.7
BOOT_5: C106.1 U6.6 | length 109.8
  Top Layer w10: U6.6@13908.43,5267.4 13952.76,5267.4 13971.85,5286.5 C106.1@13971.85,5325
BOOT_6: C180.1 U7.1 | length 85.2
  Top Layer w10: C180.1@13145,3145.32 13194.82,3145.32 13206.64,3157.14 13206.64,3175.33 U7.1@13207.01,3175.7
BOOT_7: C119.1 U8.6 | length 109.8
  Top Layer w10: U8.6@14548.07,5267.4 14592.4,5267.4 14611.5,5286.5 C119.1@14611.5,5325
BOOT_8: C169.1 U11.6 | length 109.8
  Top Layer w10: U11.6@15187.72,5267.4 15232.05,5267.4 15251.14,5286.5 C169.1@15251.14,5325
CAN_N: J9.P$3 J11.P$3 R55.2 U10.6 | length 1533.4
  Top Layer w10: J11.P$3@11791.89,7125 11839.41,7125 11894.41,7180 12182.75,7180 12282.87,7079.88 12381.38,7079.88 12408.94,7107.45 12408.94,7115.73 12402.01,7122.67 12359.22,7122.67 J9.P$3@12356.89,7125 ; 12403.09,7125 12408.94,7130.86 12408.94,7144.94 12448.12,7184.12 12761.58,7184.12 12852,7093.7 12852,7075.26 12857.86,7069.4 12881.5,7069.4 12895.2,7055.7 R55.2@12895.2,7040 12857.86,7040 12852,7034.14 12852,6948.81 12857.86,6942.95 12863.19,6942.95 12870,6936.14 U10.6@12870,6918.43
CAN_P: J9.P$2 J11.P$2 R55.1 U10.7 | length 1401.8
  Top Layer w10: J11.P$2@11910,7125 11918.67,7133.67 11918.67,7160.14 11924.52,7166 12176.96,7166 12277.08,7065.88 12387.17,7065.88 12422.94,7101.65 12422.94,7115.73 12429.88,7122.67 12472.67,7122.67 J9.P$2@12475,7125 ; 12428.8,7125 12422.94,7130.86 12422.94,7139.14 12453.92,7170.12 12755.78,7170.12 12838,7087.9 12838,7075.26 12832.14,7069.4 12808.5,7069.4 12794.8,7055.7 R55.1@12794.8,7040 12832.14,7040 12838,7034.14 12838,6948.81 12832.14,6942.95 12826.81,6942.95 12820,6936.14 U10.7@12820,6918.43
CAN_RX_LED: R54.2 U9.30 | length 925.2
  Top Layer w10: R54.2@12479.68,6690 12539.64,6690 12664.64,6815 v1(12665,6815) ; U9.30@12914.84,6517.32 12914.84,6554.84 12915,6555 12915,6570 12972.41,6627.41 12972.77,6627.41 13030.18,6684.82 13030.18,6685.18 13045,6700 v1(13045,6740)
  Bottom Layer w10: v1(12665,6815) 12970.36,6815 13045,6740.36 v1(13045,6740)
CAN_STB: U9.32 U10.8 | length 664.9
  Top Layer w10: U10.8@12770,6918.43 12770.07,6918.35 12770.07,6865.68 v1(12770.15,6865.61) ; U9.32@12875.47,6517.32 12876.73,6517.32 12876.73,6606.73 12965,6695 12965,6765 v1(13010,6810)
  Bottom Layer w10: v1(12770.15,6865.61) 12797.95,6837.8 12982.2,6837.8 v1(13010,6810)
CAN_TX_LED: R53.2 U9.31 | length 1290
  Top Layer w10: R53.2@12089.68,6690 12278.32,6690 12318.32,6650 12535,6650 v1(12665,6780) ; U9.31@12895.16,6517.32 12895.16,6584.84 12945.24,6634.92 ; 12945.28,6634.92 12995.36,6685 12995.36,6685.36 13010,6700 v1(13010,6740)
  Bottom Layer w10: v1(12665,6780) 12680,6795 12955,6795 v1(13010,6740)
COMP: C20.2 R6.2 U1.7 | length 243.8
  Top Layer w10: U1.7@15056.5,3325.3 15057.4,3326.21 15057.4,3342.4 15143.86,3428.86 15143.86,3448.35 15160.51,3465 15162.48,3465 15179.13,3481.65 15179.13,3509.76 R6.2@15184.37,3515
COMP_1: C41.2 R14.2 U2.7 | length 243.8
  Top Layer w10: U2.7@14211.5,3325.3 14212.4,3326.21 14212.4,3342.4 14298.86,3428.86 14298.86,3448.35 14315.51,3465 14317.48,3465 14334.13,3481.65 14334.13,3509.76 R14.2@14339.37,3515
COMP_2: C62.2 R22.2 U3.7 | length 243.8
  Top Layer w10: U3.7@12481.5,3795.8 12482.4,3796.71 12482.4,3812.9 12568.86,3899.36 12568.86,3918.85 12585.51,3935.5 12587.48,3935.5 12604.13,3952.15 12604.13,3980.26 R22.2@12609.37,3985.5
COMP_3: C83.2 R30.2 U4.7 | length 243.8
  Top Layer w10: U4.7@10951.5,3990.8 10952.4,3991.71 10952.4,4007.9 11038.86,4094.36 11038.86,4113.85 11055.51,4130.5 11057.48,4130.5 11074.13,4147.15 11074.13,4175.26 R30.2@11079.37,4180.5
COMP_4: C104.2 R38.2 U5.7 | length 242.7
  Top Layer w10: U5.7@11716.5,3795.3 11717.4,3796.21 11717.4,3812.4 11808.7,3903.7 11808.7,3921.22 11839.13,3951.65 11839.13,3979.76 R38.2@11844.37,3985
COMP_6: C185.2 R92.2 U7.7 | length 262.4
  Top Layer w10: U7.7@13301.5,3325.3 13302.4,3326.21 13302.4,3342.4 13388.86,3428.86 13388.86,3448.35 13405.51,3465 C185.2@13406.5,3465 13405,3466.5 R92.2@13405,3535.32 13405,3535.63 R92.2@13399.76,3540.87
CURR_3V3_BUCK: C160.1 R86.2 U9.26 | length 1935.2
  Top Layer w10: U9.26@12993.58,6517.32 12993.58,6543.23 v1@13190,6739.64 ; R86.2@14290,5905.05 C160.1@14290,5968.5 ; C160.1@14302.69,5976.19 14325.8,5976.19 v1(14354.78,6005.18)
  Bottom Layer w10: v1(13190,6740) 13220,6770 13599.96,6770 14184.96,6185 v1@14364.78,6005.18
CURR_5V_BUCK: C159.1 R84.2 U9.16 | length 841.8
  Top Layer w10: U9.16@13072.32,6300.79 13104.21,6300.79 13165,6240 v1(13240,6240) ; v1(13575,5925) 13600.87,5950.87 13633.35,5950.87 13650,5967.52 C159.1@13650,5968.5 R84.2@13650,5914.96
  Bottom Layer w10: v1(13240,6240) 13265,6215 13265,6170 13510,5925 13585,5925
CURR_7V_BUCK: C158.1 R83.2 U9.17 | length 2192.9
  Top Layer w10: R83.2@12960,4469.69 C158.1@12960,4528.5 12998.5,4528.5 v1(13025,4555) ; U9.17@13072.32,6320.47 13110.82,6320.47 13154.38,6276.91 13168.09,6276.91 v1(13170,6275)
  Bottom Layer w10: v1(13025,4555) 13365,4895 13365,5935 13170,6130 v1(13170,6275)
CURR_12V_BUCK: C157.1 R82.2 U9.11 | length 1603.2
  Top Layer w10: R82.2@12165,4974.69 C157.1@12165,5028.5 12173.67,5037.18 12234.47,5037.18 12257.29,5060 v1(12260,5060) ; U9.11@12993.58,6182.68 12993.58,6091.42 v1(13010,6075)
  Bottom Layer w10: v1@12259.14,5059.14 13010,5810 v1(13010,6075)
CURR_12V_BUCKS: C156.1 R78.2 U9.28 | length 2632
  Top Layer w10: U9.28@12954.21,6517.32 12954.21,6524.21 12955.21,6525.21 12955.21,6540.75 12955.53,6541.07 12955.53,6547.6 13146.02,6738.09 13153.09,6738.09 v1(13155,6740) ; R78.2@14935,5909.69 C156.1@14935,5968.5 ; C156.1@14942.69,5976.19 14965.8,5976.19 v1(14994.78,6005.18)
  Bottom Layer w10: v1(13155,6740) 13155,6740.35 13214.65,6800 14204.96,6800 v1@14999.78,6005.18
CURR_18V_BUCK: C155.1 R77.2 U9.8 | length 2160.5
  Top Layer w10: R77.2@11395,4974.69 C155.1@11395,5028 ; C155.1@11410,5028 11433.11,5028 v1(11469.78,5064.68) ; v1(12930,6075) 12930,6077.71 12934.53,6082.23 U9.8@12934.53,6182.68
  Bottom Layer w10: v1(11469.78,5064.68) 11994.68,5064.68 12930,6000 v1(12930,6075)
CURR_24V_BUCK: C154.1 R76.2 U9.5 | length 2661.9
  Top Layer w10: R76.2@10630,5282 C154.1@10630,5328.5 ; C154.1@10635,5328.5 10673.5,5328.5 v1(10700,5355) ; v1(12840,6120) 12840,6120.36 12864.64,6145 12865,6145 12875,6155 12875,6160 12875.47,6160.47 U9.5@12875.47,6182.68
  Bottom Layer w10: v1@10695,5355 12075,5355 v1(12840,6120)
EN_0: EN.1@15285,3054.5 R2.1 R4.2 U1.3 | length 498.1
  Top Layer w10: U1.3@15025,3175.7 15025,3105 15155,2975 R4.2@15238.5,2975 ; R2.1@15236.5,2915 15238.5,2917.01 R4.2@15238.5,2975 ; EN.1@15285,3055 15238.5,3008.5 R4.2@15238.5,2975
EN_1: EN.1@14440,3054.5 R10.1 R12.2 U2.3 | length 498.1
  Top Layer w10: U2.3@14180,3175.7 14180,3105 14310,2975 R12.2@14393.5,2975 ; R10.1@14391.5,2915 14393.5,2917.01 R12.2@14393.5,2975 ; EN.1@14440,3055 14393.5,3008.5 R12.2@14393.5,2975
EN_2: EN.1@12710,3525 R18.1 R20.2 U3.3 | length 498.1
  Top Layer w10: U3.3@12450,3646.2 12450,3575.5 12580,3445.5 R20.2@12663.5,3445.5 ; R18.1@12661.5,3385.5 12663.5,3387.51 R20.2@12663.5,3445.5 ; EN.1@12710,3525.5 12663.5,3479 R20.2@12663.5,3445.5
EN_3: EN.1@11180,3719.5 R26.1 R28.2 U4.3 | length 498.1
  Top Layer w10: U4.3@10920,3841.2 10920,3770.5 11050,3640.5 R28.2@11133.5,3640.5 ; R26.1@11131.5,3580.5 11133.5,3582.51 R28.2@11133.5,3640.5 ; EN.1@11180,3720.5 11133.5,3674 R28.2@11133.5,3640.5
EN_4: EN.1@11945,3524.5 R34.1 R36.2 U5.3 | length 497.6
  Top Layer w10: U5.3@11685,3645.2 11685,3575 11815,3445 R36.2@11898.5,3445 ; R34.1@11896.5,3385 11898.5,3387.01 R36.2@11898.5,3445 ; EN.1@11945,3525 11898.5,3478.5 R36.2@11898.5,3445
EN_6: EN.1@13530,3054.5 R44.1 R46.2 U7.3 | length 498.1
  Top Layer w10: U7.3@13270,3175.7 13270,3105 13400,2975 R46.2@13483.5,2975 ; R44.1@13481.5,2915 13483.5,2917.01 R46.2@13483.5,2975 ; EN.1@13530,3055 13483.5,3008.5 R46.2@13483.5,2975
FB_0: FB.1@15270,3520 R5.1 R8.2 U1.6 | length 457.3
  Top Layer w10: U1.6@15087.99,3325.3 15088.9,3326.21 15088.9,3338.9 15175,3425 15195,3425 15215.16,3445.16 15215.16,3465.16 ; R5.1@15170,3595.63 15215,3595.63 15215.16,3595.47 15215.16,3465.16 ; FB.1@15270,3520 15215.16,3465.16
FB_1: FB.1@14425,3520 R13.1 R16.2 U2.6 | length 457.3
  Top Layer w10: U2.6@14242.99,3325.3 14243.9,3326.21 14243.9,3338.9 14330,3425 14350,3425 14370.16,3445.16 14370.16,3465.16 ; R13.1@14325,3595.63 14370,3595.63 14370.16,3595.47 14370.16,3465.16 ; FB.1@14425,3520 14370.16,3465.16
FB_2: FB.1@12695,3990 R21.1 R24.2 U3.6 | length 496.4
  Top Layer w10: U3.6@12512.99,3795.8 12513.9,3796.71 12513.9,3809.4 12600,3895.5 12620,3895.5 12640.16,3915.66 R24.2@12640.16,4065.97 ; R21.1@12595,4066.13 12640,4066.13 R24.2@12640.16,4065.97 ; R24.2@12640,4065.32 12669.68,4065.32 12687.12,4047.88 12687.12,3997.88 FB.1@12695,3990 ; R24.2@12641.31,4065.97 R24.2@12640.16,4065.97
FB_3: FB.1@11180,3825 R29.1 R32.2 U4.6 | length 687.5
  Top Layer w10: U4.6@10982.99,3990.8 10983.9,3991.71 10983.9,4003.9 11070.5,4090.5 11095,4090.5 11120,4115.5 R29.1@11120,4170.31 11157.49,4170.31 11158.67,4169.13 R32.2@11163.35,4169.13 ; R32.2@11170,4166.5 11173.5,4170 11200,4170 11210,4160 11210,3855 FB.1@11180,3825
FB_4: FB.1@11930,3989.5 R37.1 R40.2 U5.6 | length 457.3
  Top Layer w10: U5.6@11747.99,3795.3 11748.9,3796.21 11748.9,3808.9 11835,3895 11855,3895 11875.16,3915.16 11875.16,3935.16 ; R37.1@11830,4065.63 11875,4065.63 11875.16,4065.47 11875.16,3935.16 ; FB.1@11930,3990 11875.16,3935.16
FB_5: C112.2 FB.1@14085,4835 R41.2 R42.1 U6.4 | length 563.4
  Top Layer w10: U6.4@13908.43,5192.6 13959.25,5192.6 13970.35,5181.5 14028.35,5181.5 14030.35,5183.5 C112.2@14090,5183.5 ; FB.1@14085,4835 14085,4839.1 14125,4879.1 14125,5090 14090,5125 C112.2@14090,5180.35
FB_6: FB.1@13515,3520 R47.2 R94.1 U7.6 | length 468.5
  Top Layer w10: U7.6@13332.99,3325.3 13333.9,3326.21 13333.9,3338.9 13420,3425 13440,3425 13460.16,3445.16 13460.16,3465.16 ; R47.2@13459.68,3660 13459.68,3607.91 R94.1@13462.6,3605 ; R94.1@13460,3595.63 13460.16,3595.47 13460.16,3465.16 ; FB.1@13515,3520 13460.16,3465.16
FB_7: C125.1 FB.1@14725,4829.1 R48.1 R49.2 U8.4 | length 566
  Top Layer w10: U8.4@14548.07,5192.6 14598.9,5192.6 R49.2@14610,5181.5 14667.99,5181.5 R48.1@14670,5183.5 14731.85,5183.5 C125.1@14735,5180.35 ; FB.1@14725,4829.1 14765,4869.1 14765,5080 14730,5115 C125.1@14730,5170.35
FB_8: C175.1 FB.1@15365,4834.1 R89.1 R90.2 U11.4 | length 566
  Top Layer w10: U11.4@15187.72,5192.6 15238.54,5192.6 15249.65,5181.5 15307.64,5181.5 15309.65,5183.5 15371.5,5183.5 C175.1@15374.65,5180.35 ; FB.1@15365,4834.1 15405,4874.1 15405,5085 15370,5120 C175.1@15370,5175.35
FDCAN_RX: U9.33 U10.4 | length 232.2
  Top Layer w10: U9.33@12856.73,6518.27 U9.33@12855.79,6517.32 12855.79,6622.83 12920,6687.05 U10.4@12920,6721.57
FDCAN_TX: U9.34 U10.1 | length 235
  Top Layer w10: U10.1@12771.73,6719.84 U10.1@12770,6721.57 12770,6687.05 12836.1,6620.94 U9.34@12836.1,6517.32 U9.34@12836.73,6517.95